# Altium PCB PCB_Clock_STM8.PcbDoc
Units mm, origin at the board's own origin, x right, y up, seen from the top; angles counter-clockwise.
Board outline 80 x 80 mm, 2 copper layers (Top Layer, Bottom Layer), stack 1.671 mm thick; 49 components, 32 nets, 176 pads, 118 vias.
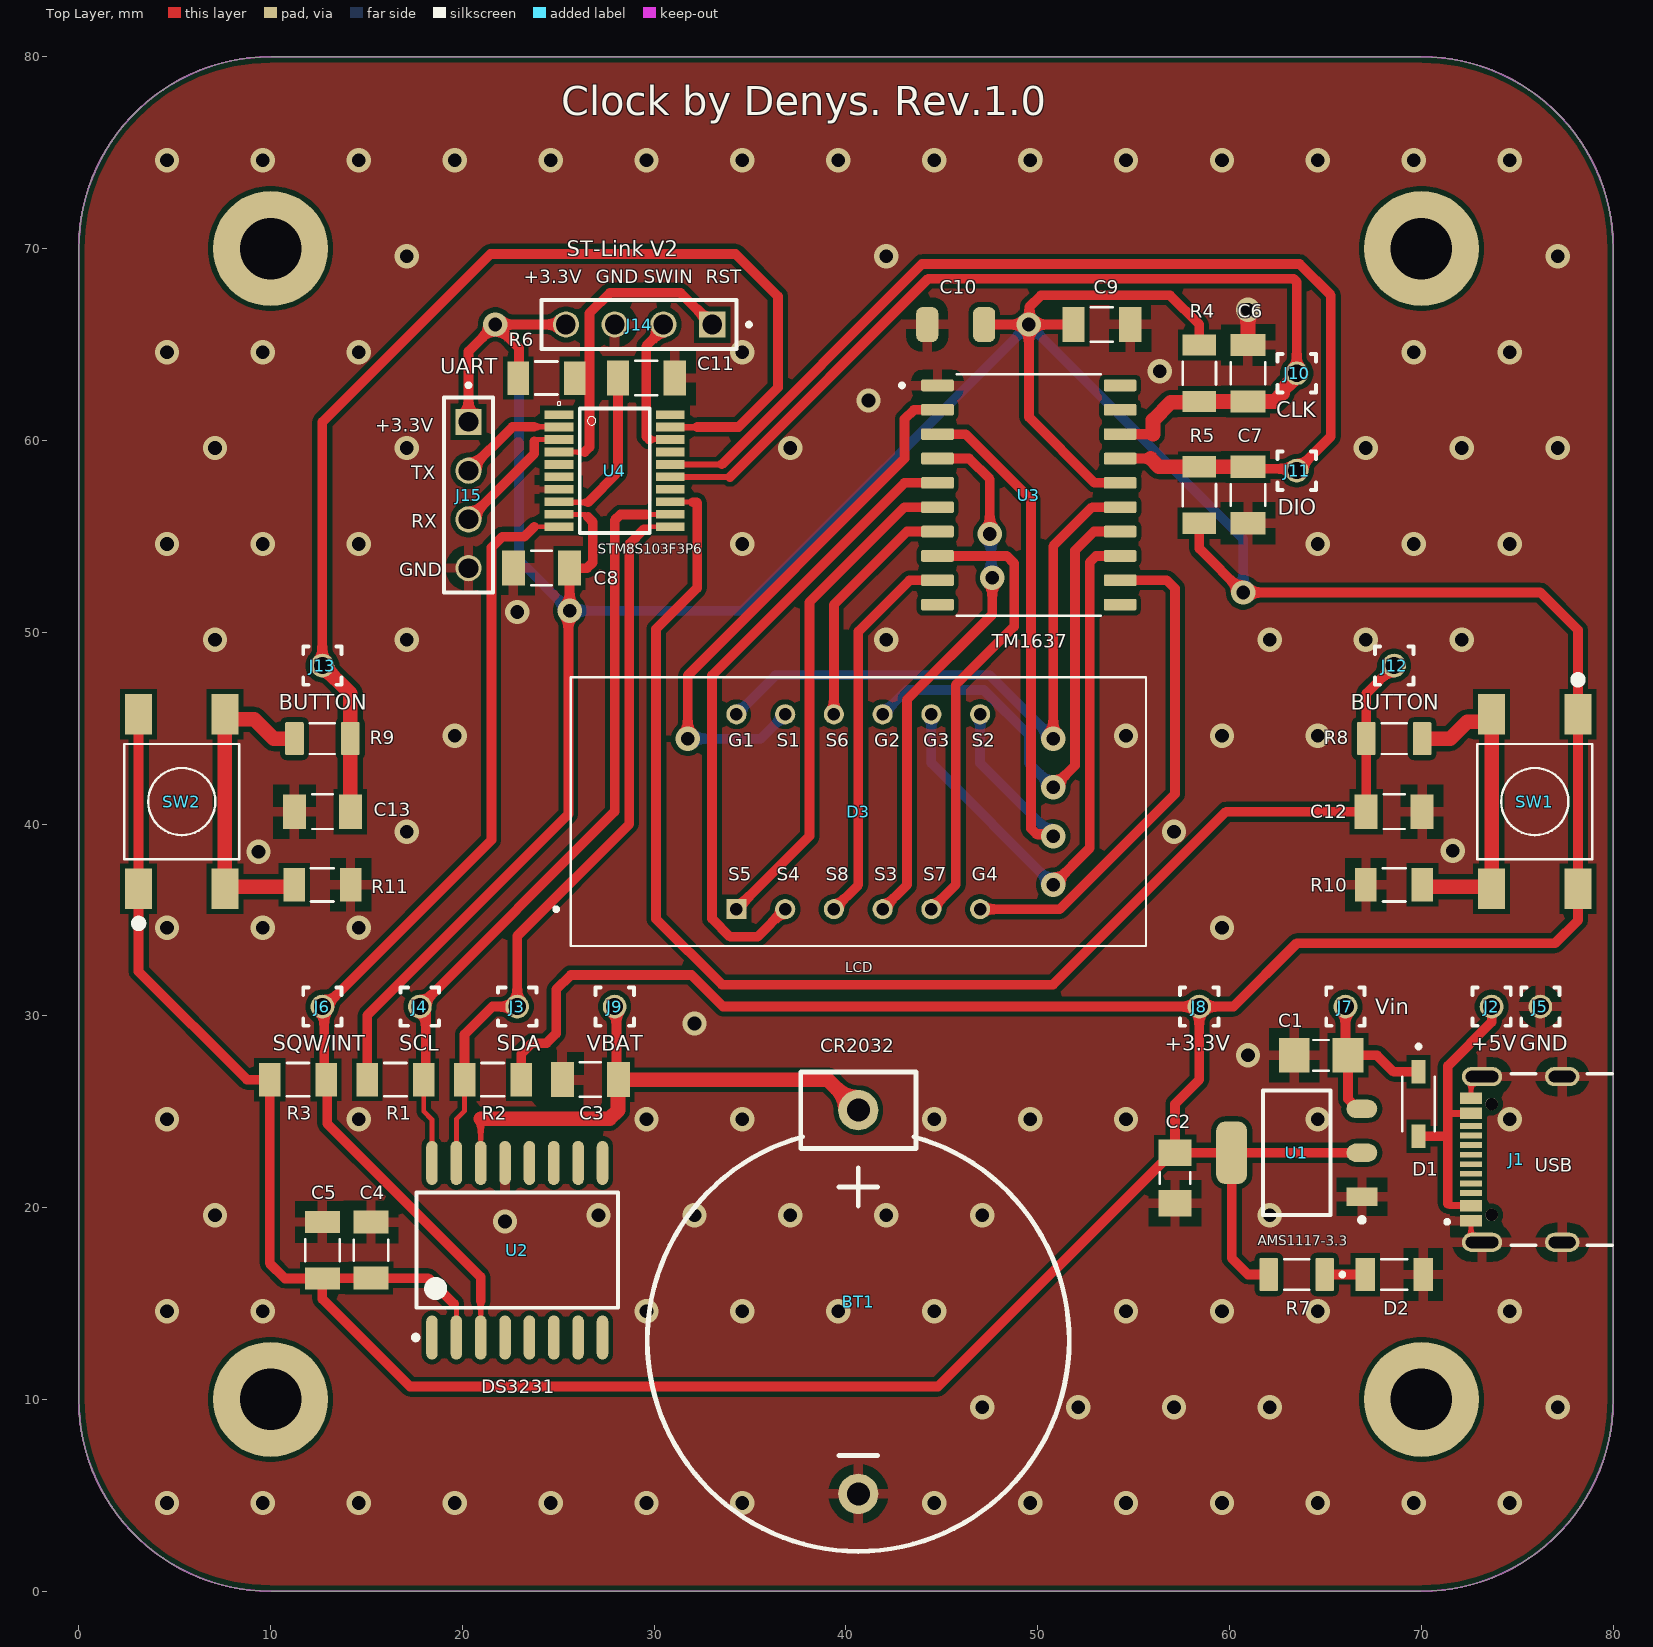
[diagram p0: Top Layer view]
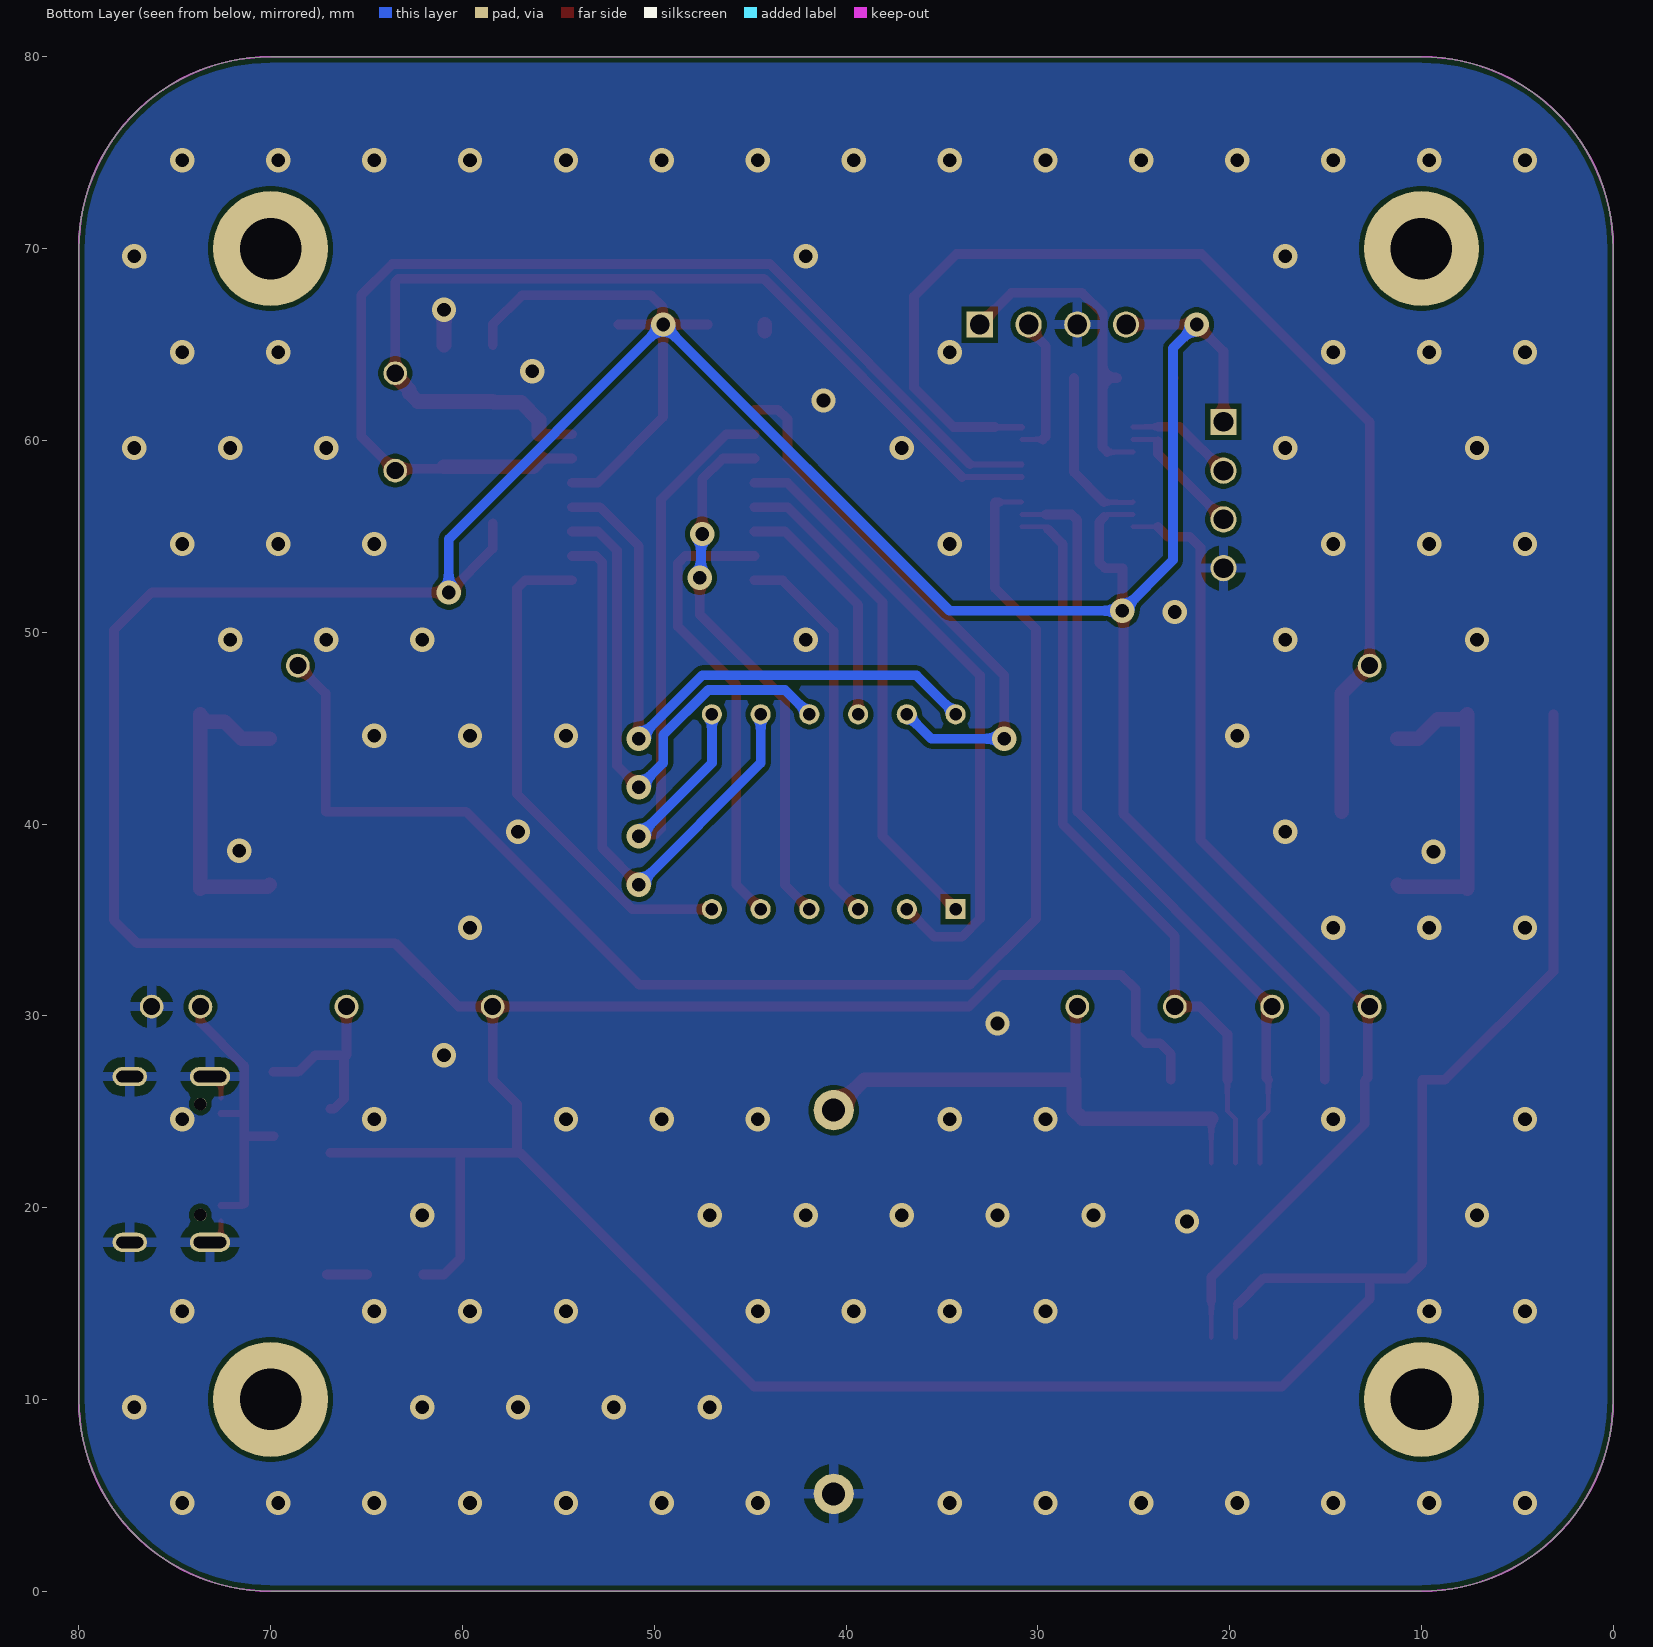
[diagram p1: Bottom Layer view, seen from below]
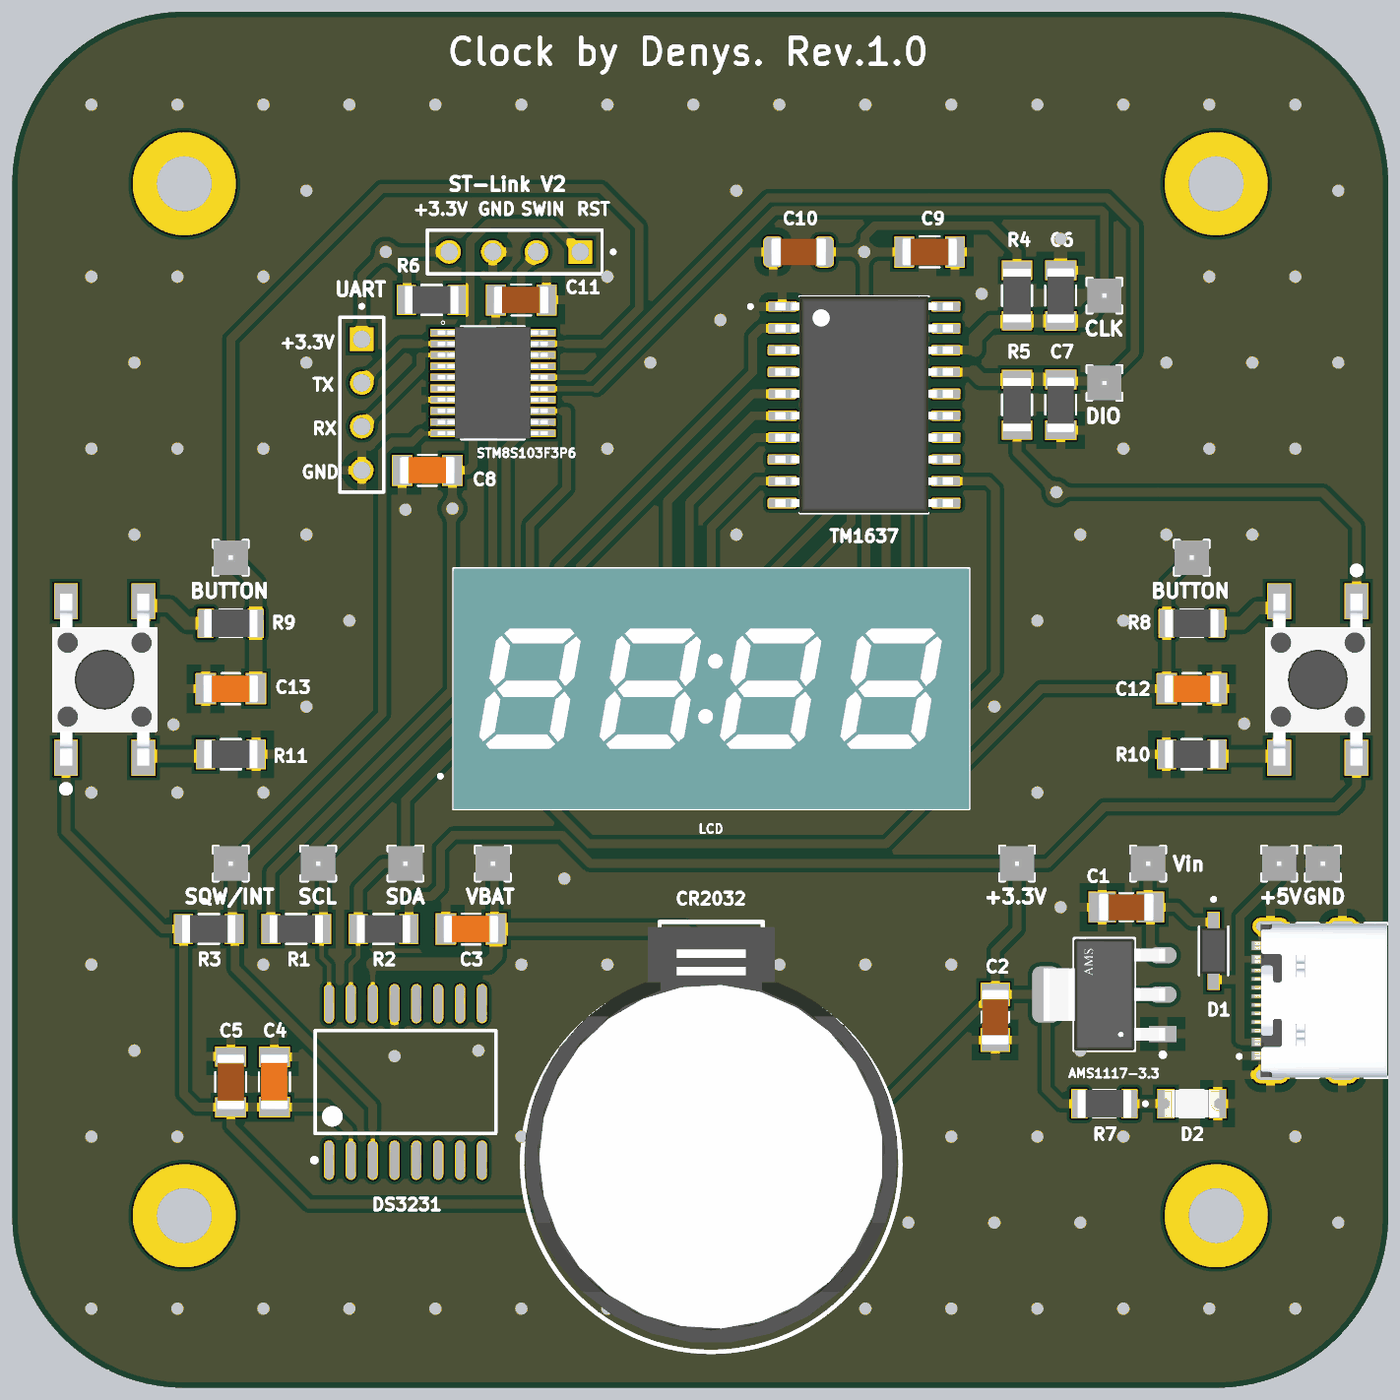
[diagram p2: 3D render of the assembled board from above, using the file's embedded part models]

## Layer stack, top to bottom
Top Solder: solder mask 0.0102, Solder Resist, Dk 3.5
Top Layer: signal copper 0.0356
Dielectric 1: dielectric 1.6, FR-4, Dk 4.8
Bottom Layer: signal copper 0.0356
Bottom Solder: solder mask 0.0102, Solder Resist, Dk 3.5

## Board outline
0,10 0,70 cw(c10,70) 10,80 70,80 cw(c70,70) 80,70 80,10 cw(c70,10) 70,0 10,0 cw(c10,10)

## Design rules (kind name [scope] priority, off if disabled: settings)
Clearance [All] p1: gap=0.254 ignorepadtopadclearanceinfootprint=TRUE
HoleSize [All] p1: absolutevalues=TRUE maxlimit=3.81 minlimit=0.025 maxpercent=80.000 minpercent=20.000
PasteMaskExpansion [All] p1: expansion=-0.05
PlaneConnect [All] p1: planeconnectstyle=Relief reliefexpansion=0.508 reliefentries=4 reliefconductorwidth=0.254 reliefairgap=0.508
PolygonConnect [All] p1: thpad.connectstyle=Relief thpad.reliefconductorwidth=0.508 thpad.reliefentries=4 thpad.polygonreliefangle="90 Angle" thpad.airgapwidth=0.508 smdpad.connectstyle=Relief smdpad.reliefconductorwidth=0.508 smdpad.reliefentries=4 smdpad.polygonreliefangle="90 Angle" smdpad.airgapwidth=0.508 via.connectstyle=Direct via.reliefconductorwidth=0.254 via.reliefentries=4 via.polygonreliefangle="90 Angle" via.airgapwidth=0.508
RoutingVias [All] p1: holewidth=0.711 width=1.27 viastyle="Through Hole" minholewidth=0.3 minwidth=0.6 maxholewidth=0.711 maxwidth=1.27
SMDNeckDown [All] p1: percent=90.000
SilkToSilkClearance [All] p1: silktosilkclearance=0.203
SilkToSolderMaskClearance [IsPad] p1: minsilkscreentomaskgap=0.127 clearancetoexposedcopper=TRUE
SolderMaskExpansion [All] p1: expansion=0.102 istentingtop=FALSE
SupplyNets "Schematic Supply Nets_2" [InNet('GND')] p1: voltage=0.000
SupplyNets "Schematic Supply Nets_1" [InNet('+5')] p2: voltage=0.000
SupplyNets "Schematic Supply Nets" [InNet('+3.3V')] p3: voltage=0.000
Width [All] p1: maxlimit=0.762 minlimit=0.254 preferedwidth=0.508 minimp=50.000000 maximp=50.000000 favimp=50.000000
25 further rules are at their usual default settings.

## Components (designator, comment, footprint, x,y, rotation, side; value= is the part's Value field where it differs from the comment)
BT1 "CR2032" PCB_Battery 40.64,5.08 r180 top
C1 "10uF" CAPC3216X190 64.77,27.94 r180 top
C2 "22uF" CAPC3216X125N 57.15,21.542 r90 top
C3 "100nF" CAPC3216X180N 26.67,26.67 r180 top
C4 "100nF" CAPC3216X180N 15.24,17.78 r90 top
C5 "1uF" CAPC3216X110N 12.7,17.78 r90 top
C6 "100pF" CAPC3216X110N 60.96,63.5 r90 top
C7 "100pF" CAPC3216X110N 60.96,57.15 r270 top
C8 "100nF" CAPC3216X180N 24.13,53.34 r180 top
C9 "1uF" CAPC3216X110N 53.34,66.04 r0 top
C10 "100uF" CAP3216X125N 45.72,66.04 r180 top
C11 "680nF" CAPC3216X110N 29.591,63.246 r0 top
C12 "100nF" CAPC3216X180N 68.58,40.64 r0 top
C13 "100nF" CAPC3216X180N 12.7,40.64 r180 top
D1 "1N5819" SOD3715X145N 69.85,25.4 r270 top
D2 "LED" LEDC3216X120N 68.58,16.51 r0 top
D3 "LCD" LED_LDQ-M3604RI 40.64,40.64 r0 top
J1 "USB" GCT_USB4105-GF-A 77.34,22.51 r90 top
J2 "+5V" SAMTEC_MTMM-101-X-X-S-X 73.66,30.48 r90 top
J3 "SDA" SAMTEC_MTMM-101-X-X-S-X 22.86,30.48 r180 top
J4 "SCL" SAMTEC_MTMM-101-X-X-S-X 17.78,30.48 r180 top
J5 "GND" SAMTEC_MTMM-101-X-X-S-X 76.2,30.48 r90 top
J6 "SQW/INT" SAMTEC_MTMM-101-X-X-S-X 12.7,30.48 r90 top
J7 "Vin" SAMTEC_MTMM-101-X-X-S-X 66.04,30.48 r90 top
J8 "+3.3V" SAMTEC_MTMM-101-X-X-S-X 58.42,30.48 r90 top
J9 "VBAT" SAMTEC_MTMM-101-X-X-S-X 27.94,30.48 r90 top
J10 "CLK" SAMTEC_MTMM-101-X-X-S-X 63.5,63.5 r90 top
J11 "DIO" SAMTEC_MTMM-101-X-X-S-X 63.5,58.42 r90 top
J12 "BUTTON" SAMTEC_MTMM-101-X-X-S-X 68.58,48.26 r90 top
J13 "BUTTON" SAMTEC_MTMM-101-X-X-S-X 12.7,48.26 r90 top
J14 "ST-Link V2" SAMTEC_TSW-104-07-S-S 29.21,66.04 r180 top
J15 "UART" SAMTEC_TSW-104-07-S-S 20.32,57.15 r270 top
R1 "10k" RESC3216X71N 16.51,26.67 r0 top
R2 "10k" RESC3216X71N 21.59,26.67 r180 top
R3 "10k" RESC3216X71N 11.43,26.67 r0 top
R4 "10k" RESC3216X71N 58.42,63.5 r270 top
R5 "10k" RESC3216X71N 58.42,57.15 r90 top
R6 "10k" RESC3216X71N 24.384,63.246 r0 top
R7 "1k" RESC3116X65N 63.5,16.51 r180 top
R8 "1k" RESC3116X65N 68.58,44.45 r180 top
R9 "1k" RESC3116X65N 12.7,44.45 r0 top
R10 "10k" RESC3216X71N 68.58,36.83 r180 top
R11 "10k" RESC3216X71N 12.7,36.83 r0 top
SW1 "BUTTON" TE_4-1437565-9 75.91,41.17 r270 top
SW2 "BUTTON" TE_4-1437565-9 5.37,41.17 r90 top
U1 "AMS1117-3.3" FP-AMS1117-IPC_A 63.5,22.86 r180 top
U2 "DS3231" W16#H2_N 22.86,17.78 r90 top
U3 "TM1637" SOIC127P1035X255-20N 49.53,57.15 r0 top
U4 "STM8S103F3P6" SOP65P640X120-20N 27.94,58.42 r0 top

## Footprints (in the part's own frame and the unit in brackets; to place one, negate y for a bottom-side part, rotate by r counter-clockwise, add the part's x,y. Pads: shape width x height; smd on the part's side, far side on the other; paste and mask are expansions set on the pad)
CAP3216X125N [mm]
  rrect54% 1.15x1.82 smd: 1(-1.485,0) 2(1.485,0)
  body extent -1.6,-0.8 1.6,0.8, height 1.8
CAPC3216X110N [mm]
  rect 1.16x1.82 smd: 1(-1.475,0) 2(1.475,0)
  silkscreen extent -0.57,-0.9 0.57,0.9, body extent -1.6,-0.8 1.6,0.8, height 1.4
CAPC3216X125N [mm]
  rect 1.38x1.71 smd: 1(-1.318,0) 2(1.318,0)
  silkscreen extent -0.31,-0.8 0.31,0.8, body extent -1.6,-0.8 1.6,0.8, height 1.9
CAPC3216X180N [mm]
  rect 1.2x1.82 smd: 1(-1.46,0) 2(1.46,0)
  silkscreen extent -0.54,-0.9 0.54,0.9, body extent -1.6,-0.8 1.6,0.8, height 1.8
CAPC3216X190 [mm]
  rect 1.6x1.8 smd: 1(-1.4,0) 2(1.4,0)
  silkscreen extent -0.4,-0.8 0.4,0.8, body extent -1.6,-0.8 1.6,0.8, height 1.8
FP-AMS1117-IPC_A [mm]
  rect 1.604x0.952 smd paste+0 mask+0: 1(-3.395,2.29)
  rrect100% 1.604x0.952 smd paste+0 mask+0: 2(-3.395,0) 3(-3.395,-2.29)
  rrect59% 1.604x3.262 smd paste+0 mask+0: 4(3.395,0)
  silkscreen extent -3.52,-3.25 1.75,3.62, body extent -4.7,-3.75 4.7,3.75, height 0.25
GCT_USB4105-GF-A [mm]
  rect 0.6x1.15 smd mask-0.05: A1_B12(-3.2,4.755) A4_B9(-2.4,4.755) B1_A12(3.2,4.755) B4_A9(2.4,4.755)
  rect 0.3x1.15 smd mask-0.05: A5(-1.25,4.755) A6(-0.25,4.755) A7(0.25,4.755) A8(1.25,4.755) B5(1.75,4.755) B6(0.75,4.755) B7(-0.75,4.755) B8(-1.75,4.755)
  oval 1x2.1 hole 0.6 slot 1.7 at 90 deg: SH1(-4.32,4.18) SH2(4.32,4.18)
  oval 1x1.8 hole 0.6 slot 1.4 at 90 deg: SH3(-4.32,0) SH4(4.32,0)
  round 0.65 hole 0.65 unplated mask-0.05: ""(-2.89,3.68) ""(2.89,3.68)
  silkscreen extent -4.47,-2.6 4.47,6.1, body extent -4.47,-2.6 4.47,5.11, height 3.31
LED_LDQ-M3604RI [mm]
  rect 1.05x1.05 / inner round 1.05 / far side rect 1.05x1.05 hole 0.65: 1(-6.35,-5.08)
  round 1.05 hole 0.65: 2(-3.81,-5.08) 3(-1.27,-5.08) 4(1.27,-5.08) 5(3.81,-5.08) 6(6.35,-5.08) 7(6.35,5.08) 8(3.81,5.08) 9(1.27,5.08) 10(-1.27,5.08) 11(-3.81,5.08) 12(-6.35,5.08)
  silkscreen extent -15.85,-7 15,7, body extent -15,-7 15,7, height 7.2
LEDC3216X120N [mm]
  rect 1.01x1.73 smd: NEG(1.51,0) POS(-1.51,0)
  silkscreen extent -2.8,-0.8 0.68,0.8, body extent -1.6,-0.8 1.6,0.8, height 1.2
PCB_Battery [mm] "Cell Holder for CR2032"
  round 2.1 hole 1.2: 1(0,-20) 2(0,0)
  silkscreen extent -11,-22 11,3, body extent -10.85,-21.7 10.85,2.5, height 7.5
RESC3116X65N [mm]
  rrect15% 0.97x1.73 smd: 1(-1.455,0) 2(1.455,0)
  silkscreen extent -0.65,-0.8 0.65,0.8, body extent -1.55,-0.8 1.55,0.8, height 0.65
RESC3216X71N [mil]
  rect 44x69 smd: 1(-58,0) 2(58,0)
  silkscreen extent -23,-34 23,34, body extent -61,-31 61,31, height 26
SAMTEC_MTMM-101-X-X-S-X [mm]
  round 1.24 hole 0.89: 01(0,0)
  silkscreen extent -1,-1 1,1, body extent -1,-1 1,1, height 4.55
SAMTEC_TSW-104-07-S-S [mm]
  rect 1.37x1.37 hole 1.02: 01(-3.81,0)
  round 1.37 hole 1.02: 02(-1.27,0) 03(1.27,0) 04(3.81,0)
  silkscreen extent -5.83,-1.27 5.08,1.27
SOD3715X145N [mm]
  rect 1.21x0.73 smd: A(1.68,0) C(-1.68,0)
  silkscreen extent -3.1,-0.85 1.42,0.85, body extent -1.83,-0.77 1.83,0.77, height 0.8
SOIC127P1035X255-20N [mm]
  rrect25% 1.7x0.61 smd: 1(-4.76,5.715) 2(-4.76,4.445) 3(-4.76,3.175) 4(-4.76,1.905) 5(-4.76,0.635) 6(-4.76,-0.635) 7(-4.76,-1.905) 8(-4.76,-3.175) 9(-4.76,-4.445) 10(-4.76,-5.715) 11(4.76,-5.715) 12(4.76,-4.445) 13(4.76,-3.175) 14(4.76,-1.905) 15(4.76,-0.635) 16(4.76,0.635) 17(4.76,1.905) 18(4.76,3.175) 19(4.76,4.445) 20(4.76,5.715)
  silkscreen extent -6.71,-6.3 3.75,6.3, body extent -5.18,-6.3 5.18,6.3, height 2.55
SOP65P640X120-20N [mm]
  rect 1.5x0.45 smd: 1(-2.9,2.925) 2(-2.9,2.275) 3(-2.9,1.625) 4(-2.9,0.975) 5(-2.9,0.325) 6(-2.9,-0.325) 7(-2.9,-0.975) 8(-2.9,-1.625) 9(-2.9,-2.275) 10(-2.9,-2.925) 11(2.9,-2.925) 12(2.9,-2.275) 13(2.9,-1.625) 14(2.9,-0.975) 15(2.9,-0.325) 16(2.9,0.325) 17(2.9,0.975) 18(2.9,1.625) 19(2.9,2.275) 20(2.9,2.925)
  silkscreen extent -3,-3.25 1.82,3.6, body extent -3.2,-3.25 3.2,3.25, height 1.29
TE_4-1437565-9 [mm]
  rect 2.1x1.4 smd: 1(-4.55,2.25) 2(4.55,2.25) 3(-4.55,-2.25) 4(4.55,-2.25)
  silkscreen extent -6.55,-3 3,3, body extent -5,-3 5,3, height 7.26
W16#H2_N [mm] "SOIC, 16-Leads, Body 10.3x7.5mm, Pitch 1.27mm, IPC Medium Density"
  oval 2.3x0.6 smd: 1(-4.55,4.445) 2(-4.55,3.175) 3(-4.55,1.905) 4(-4.55,0.635) 5(-4.55,-0.635) 6(-4.55,-1.905) 7(-4.55,-3.175) 8(-4.55,-4.445) 9(4.55,-4.445) 10(4.55,-3.175) 11(4.55,-1.905) 12(4.55,-0.635) 13(4.55,0.635) 14(4.55,1.905) 15(4.55,3.175) 16(4.55,4.445)
  silkscreen extent -4.67,-5.25 3,5.42, body extent -3.8,-5.25 3.8,5.25, height 2.65

## Part data
BT1: library part Battery, "Cell Holder for CR2032"
C1: library part GRM31CB31E106KA75L, "Cap Ceramic 10uF 25V B 10% Pad SMD 1206 85Â°C T/R", Package=None, Availability=Unavailable, MP=GRM31CB31E106KA75L, Price=None
C2: library part GRM31CR61E226KE15L, "CAPACITOR, 1206, X5R, 25V, 22UF; Dielectric Characteristic:X5R; Capacitance:22µF; Capacitance Tolerance:± 10%; Voltage Rating:25V; Series:GRM Hi-Cap; Capacitor Case Style:1206; No. of Pins:2; Capacitor Mounting:SMD; SVHC:No SVHC ;RoHS Compliant: Yes", Package=None, Availability=Unavailable, MP=altium_native_batch, Price=None
C3 C4 C8 C12 C13: library part CL31B104KBCNNNC, "Ceramic capacitor SMD 1206 100 nF 50 V 10 % Samsung Electro-Mechanics CL31B104KBCNNNC 4000 pc(s)", Package="1206 Samsung", Availability="In Stock", Check_prices=https://www.snapeda.com/parts/CL31B104KBCNNNC/Samsung+Electro-Mechanics/view-part/?ref=eda, MF="Samsung Electro-Mechanics", MP=CL31B104KBCNNNC, Price=None, Purchase-URL=https://pricing.snapeda.com/search/part/CL31B104KBCNNNC/?ref=eda, SnapEDA_Link=https://www.snapeda.com/parts/CL31B104KBCNNNC/Samsung+Electro-Mechanics/view-part/?ref=snap
C5 C9: library part C1206C105J3RACTU, "CAP CER 1UF 25V X7R 1206", Package=None, Availability=Unavailable, MP=C1206C105J3RACTU, Price=None
C6 C7: library part C1206C101JBGACTU, "CAP, MLCC, C0G, 100PF, 630V, 1206", Package=None, Availability=Unavailable, MP=C1206C101JBGACTU, Price=None
C10: library part GRM31CR60J107KE39L, "100µF Â±10% 6.3V Ceramic Capacitor X5R 1206 _3216 Metric_", Package="1206 Murata", Digi-Key_Part_Number=490-13982-1-ND, Digi-Key_Purchase_URL=https://www.digikey.com/product-detail/en/murata-electronics/GRM31CR60J107KE39L/490-13982-1-ND/6155812?utm_source=snapeda&utm_medium=aggregator&utm_campaign=symbol, MF="Murata Electronics", MP=GRM31CR60J107KE39L, SnapEDA_Link=https://www.snapeda.com/parts/GRM31CR60J107KE39L/Murata%20Electronics%20North%20America/view-part/1756509/?ref=snap
C11: library part C1206C684K5RACTU, ".68UF 50V 10% 1206", Package=None, Availability=Unavailable, MP=C1206C684K5RACTU, Price=None
D1: library part 1N5819HW-7, "Diode Schottky 40 V 1A Surface Mount SOD-123", Package="SOD-123 Fairchild Semiconductor", Availability="In Stock", Check_prices=https://www.snapeda.com/parts/1N5819HW-7/Diodes+Inc./view-part/?ref=eda, MF="Diodes Inc.", MP=1N5819HW-7, Price=None, Purchase-URL=https://pricing.snapeda.com/search/part/1N5819HW-7/?ref=eda, SnapEDA_Link=https://www.snapeda.com/parts/1N5819HW-7/Diodes+Inc./view-part/?ref=snap
D2: library part LHN974_RED_LED_1206, "2.6 V Red LED SMD", Package=None, Availability="Not in stock", Check_prices=https://www.snapeda.com/parts/LHN974%20RED%20LED%201206/Osram/view-part/7899607/?ref=eda, MF=Osram, MP="LHN974 RED LED 1206", Price=None, SnapEDA_Link=https://www.snapeda.com/parts/LHN974%20RED%20LED%201206/Osram/view-part/7899607/?ref=snap
D3: library part LDQ-M3604RI, "Display, Seven Segment, 9.2MM, Red", Package=None, Check_prices=https://www.snapeda.com/parts/LDQ-M3604RI/Lumex/view-part/?ref=eda, MF=Lumex, MP=LDQ-M3604RI, SnapEDA_Link=https://www.snapeda.com/parts/LDQ-M3604RI/Lumex/view-part/?ref=snap
J1: library part USB4105-GF-A, Package=None, Availability=Unavailable, MF="{'manufacturer': u'GCT'}", MP=USB4105-GF-A, Price=None
J2 J3 J4 J5 J6 J7 J8 J9 J10 J11 J12 J13: library part MTMM-101-X-X-S-X, "Connector Header Through Hole 1 position", Package=None, Check_prices=https://www.snapeda.com/parts/MTMM-101-05-G-S-225/Samtec/view-part/?ref=eda, MF=Samtec, MP=MTMM-101-05-G-S-225, SnapEDA_Link=https://www.snapeda.com/parts/MTMM-101-05-G-S-225/Samtec/view-part/?ref=snap
J14 J15: library part TSW-104-07-S-S, Package=None, Availability=Unavailable, MF="Samtec Inc.", MP=TSW-104-07-S-S, Price=None
R1 R2 R3 R4 R5 R6 R10 R11: library part RC1206FR-0710KL, "RES, 10K, 1%, 0.25W, 1206, THICK FILM; Resistor Case Style:1206 [3216 Metric]; Resistance:10kohm; Product Range:RC Series; Voltage Rating:200V; Resistor Element Material:Thick Film; Power Rating:250mW; Resistance Tolerance:Â± 1%; Temperature Coefficient:Â± 100ppm/Â°C; Automotive Qualification Standard:-; SVHC:No SVHC (15-Jan-2019)", Package="1206-2 YAGEO", Check_prices=https://www.snapeda.com/parts/RC1206FR0710KL/Yageo/view-part/?ref=eda, MF="Yageo Corporation", MP=RC1206FR0710KL, SnapEDA_Link=https://www.snapeda.com/parts/RC1206FR0710KL/Yageo/view-part/?ref=snap
R7 R8 R9: library part SR1206FR-071KL, "Surge Chip Resistor Automotive Grade Thick Film 1206 1kOhm 1% Paper T/R", Package="1206-2 YAGEO", Check_prices=https://www.snapeda.com/parts/SR1206FR071KL/Yageo/view-part/?ref=eda, MF="Yageo Corporation", MP=SR1206FR071KL, SnapEDA_Link=https://www.snapeda.com/parts/SR1206FR071KL/Yageo/view-part/?ref=snap
SW1 SW2: library part 4-1437565-9, "Alcoswitch, Switch, Tactile, 50 mA, SPST, Pushbutton, Off[On], FSM6JSMA", Contact_Current_Rating="50 mA", Package=None, Check_prices=https://www.snapeda.com/parts/FSM6JSMA/TE+Connectivity+ALCOSWITCH+Switches/view-part/?ref=eda, Configuration_Pole-Throw="Single Pole - Single Throw", EU_RoHS_Compliance=Compliant, MF="TE Connectivity", MP=FSM6JSMA, SnapEDA_Link=https://www.snapeda.com/parts/FSM6JSMA/TE+Connectivity+ALCOSWITCH+Switches/view-part/?ref=snap
U1: library part CMP-209535-000001-1, "LDO Voltage Regulators 1A, 3.3V", Dropout Voltage=1.1V, Manufacturer="Advanced Monolithic Systems", Max Junction Temp=+125°C, Max Power Dissipation=1.2W, Max Supply Voltage=15V, Nominal Supply Current=5mA, Output Current=1A, Output Voltage=3.3V, Package=AMS1117, Temperature="-40°C to +125°C", Temperature Range Low=-40°C, Automotive=No, Category=IC, ComponentLink2Description=Datasheet, ComponentLink2URL=http://www.advanced-monolithic.com/pdf/ds1117.pdf, Device Class L1="Integrated Circuits (ICs)", Device Class L2="Power Management ICs", Device Class L3="Voltage Regulators - Linear", Height=1.8mm, Ipc Land Pattern Name=SOT229P700X180-4, Lead Free=Yes, Manufacturer Part Number=AMS1117-3.3, Number Of Outputs=1, Octopart=https://octopart.com/ams1117-3.3-advanced+monolithic+systems-25899300, Output Type=Fixed, RoHS=TRUE, Standoff Height=0.64mm, Temperature Range High=+125°C
U2: library part CMP-0254-00293-2, "Extremely Accurate I2C-Integrated Real-Time Clock/TCXO/Crystal, 16-Pin SO, -40 to 85 degC, RoHS Qualified", Code_IPC=SOIC127P1030-16, Code_JEDEC=MS-013-AA, ComponentLink1Description="Manufacturer URL", ComponentLink1URL=http://www.maxim-ic.com, ComponentLink2Description=Datasheet, ComponentLink2URL=http://datasheets.maxim-ic.com/en/ds/DS3231.pdf, ComponentLink3Description="Package Specification", ComponentLink3URL=http://pdfserv.maxim-ic.com/package_dwgs/21-0042.PDF, DatasheetVersion="Rev 8, Jul-2010", PackageDescription="16-Pin Small-Outline IC, Wide (0.3in), 1.27 mm Pitch, SOIC (W), RoHS Qualified", PackageReference=W16#H2, PackageVersion="revD, 2010"
U3: library part TM1637_SOP20, "LED Drive Control Special Circuit", Package=Package, Check_prices=https://www.snapeda.com/parts/TM1637_SOP20/Titan+Micro+Electronics/view-part/?ref=eda, MF="Titan Micro Electronics", MP=TM1637_SOP20, SnapEDA_Link=https://www.snapeda.com/parts/TM1637_SOP20/Titan+Micro+Electronics/view-part/?ref=snap
U4: "STM8 series Microcontroller IC 8-Bit 16MHz 8KB (8K x 8) FLASH 20-TSSOP", Package="TSSOP-20 STMicroelectronics", Check_prices=https://www.snapeda.com/parts/STM8S103F3P6/STMicroelectronics/view-part/?ref=eda, MF=STMicroelectronics, MP=STM8S103F3P6, SnapEDA_Link=https://www.snapeda.com/parts/STM8S103F3P6/STMicroelectronics/view-part/?ref=snap

## Free pads (board coordinates)
  round 6 hole 3.2: 1(10,10) 2(10,70) 3(70,70) 4(70,10)

## Via types
v1: diameter 1.27, hole 0.711, Top Layer to Bottom Layer, tented both sides, 118 vias

## Nets (pads, with @x,y where several pads share a name; then routed paths per layer and width w, separated by ;. In a path a pad name is that pad's centre, name@x,y a point inside that pad or via, vN(x,y) a via of type N, cw(c..) or ccw(c..) an arc to the next point about the centre after c; other vN are vias at no path point)
+3.3V: C2.2 C4.1 C5.1 C8.1 C9.1 C10.1 J8.01 J14.04 J15.01 R1.1 R2.1 R3.1 R4.1 R5.1 R6.1 R7.2 SW1.1 SW1.2 SW2.1 SW2.2 U1.2 U1.4 U2.2 U3.16 U4.9 | length 364.3
  Top Layer w0.254: 19.558,14.986 19.685,14.859 U2.2 ; U4.9 26.405,56.145 26.543,56.007
  Top Layer w0.508: SW2.2 SW2.1 3.12,32.313 8.763,26.67 R3.1 9.957,17.094 10.746,16.305 C5.1 ; R1.1 15.037,30.023 25.527,40.513 25.527,51.055 v1(25.59,51.118) C8.1 26.499,53.34 26.797,53.638 26.797,55.753 26.543,56.007 ; 19.558,14.986 18.224,16.32 C4.1 15.233,16.313 12.707,16.313 C5.1 ; J15.01 20.32,64.643 v1(21.717,66.04) ; R6.1 22.949,63.284 22.949,64.808 v1(21.717,66.04) ; R2.1 23.063,28.016 23.622,28.575 24.384,28.575 24.892,29.083 24.892,31.369 25.654,32.131 31.942,32.131 33.593,30.48 J8.01 ; J14.04 v1(21.717,66.04) ; C10.1 v1(49.535,66.04) ; C9.1 v1(49.535,66.04) ; U3.16 52.959,57.785 49.535,61.209 v1(49.535,66.04) ; R5.1 58.42,54.356 v1(60.706,52.07) 76.2,52.07 78.16,50.11 SW1.1 SW1.2 78.16,34.98 76.962,33.782 63.5,33.782 60.198,30.48 J8.01 ; R4.1 58.42,66.04 56.896,67.564 50.165,67.564 49.568,66.967 49.568,66.073 v1(49.535,66.04) ; R7.2 60.96,16.51 60.105,17.365 U1.4 ; U1.2 U1.4 ; C5.1 12.7,15.24 17.272,10.668 44.793,10.668 56.985,22.86 C2.2 ; C2.2 57.15,25.4 58.42,26.67 J8.01 ; C2.2 U1.4
  Bottom Layer w0.508: v1(21.717,66.04) 22.949,64.808 22.949,53.759 v1(25.59,51.118) 34.613,51.118 v1(49.535,66.04) 60.706,54.869 v1(60.706,52.07)
+5: D1.A J1.A4_B9 J1.B4_A9 J2.01 | length 14.8
  Top Layer w0.381: 71.482,20.11 J1.A4_B9 ; 71.61,24.91 J1.B4_A9
  Top Layer w0.508: D1.A 71.32,23.72 ; 71.374,20.218 71.374,27.381 73.66,29.667 J2.01
Button1: C12.1 J12.01 R8.2 U4.13 | length 74.4
  Top Layer w0.254: U4.13 31.978,56.795 32.004,56.769
  Top Layer w0.508: 32.004,56.769 32.214,56.769 32.238,56.745 32.238,52.304 30.099,50.165 30.099,35.052 33.528,31.623 50.8,31.623 59.819,40.642 67.122,40.642 67.122,44.448 R8.2 67.125,46.805 J12.01
Button2: C13.1 J13.01 R9.2 U4.19 | length 60.4
  Top Layer w0.342: U4.19 32.25,60.695
  Top Layer w0.508: J13.01 12.7,60.96 21.463,69.723 34.239,69.723 36.449,67.513 36.449,62.752 34.391,60.695 32.25,60.695
  Top Layer w0.762: J13.01 14.155,46.805 R9.2 14.158,44.448 14.158,40.642 C13.1
CLK: C6.1 J10.01 R4.2 U3.18 U4.15 | length 52.9
  Top Layer w0.3: U4.15 33.955,58.095
  Top Layer w0.508: 33.955,58.095 44.287,68.428 63.337,68.428 63.5,68.264 J10.01 ; U3.18 56.007,60.325
  Top Layer w0.762: 56.007,60.325 56.007,61.062 56.932,61.987 58.38,61.987 R4.2 ; R4.2 C6.1@60.959,62.026 ; C6.1 60.962,62.027 62.332,62.027 62.778,62.473 62.778,62.649 63.5,63.371 J10.01
DIO: C7.1 J11.01 R5.2 U3.17 U4.16 | length 58.8
  Top Layer w0.3: U4.16 33.515,58.745 33.523,58.753
  Top Layer w0.508: 33.523,58.753 33.527,58.753 43.964,69.19 63.652,69.19 65.272,67.57 65.272,60.192 J11.01 63.398,58.522 61.062,58.522 C7.1 ; U3.17 55.88,59.055
  Top Layer w0.762: 55.88,59.055 56.312,58.623 R5.2 ; R5.2 C7.1@60.959,58.624
GND: BT1.2 C1.2 C2.1 C3.2 C4.2 C5.2 C6.2 C7.2 C8.2 C9.2 C10.2 C11.2 C12.2 C13.2 D2.NEG J1.A1_B12 J1.B1_A12 J1.SH1 J1.SH2 J1.SH3 J1.SH4 J5.01 J14.03 J15.04 R10.2 R11.2 U1.1 U2.13 U3.1 U4.7 | length 5.1
  Top Layer w0.254: J1.A1_B12 72.585,18.535 72.93,18.19 J1.SH1 ; J1.B1_A12 72.585,26.485 72.93,26.83 J1.SH2
  Top Layer w0.762: C10.2@44.235,65.705 C10.2 ; C6.2 v1(60.96,66.802)
  other v1: 4.6,4.6 9.6,4.6 14.6,4.6 19.6,4.6 24.6,4.6 29.6,4.6 34.6,4.6 44.6,4.6 49.6,4.6 54.6,4.6 59.6,4.6 64.6,4.6 69.6,4.6 74.6,4.6 47.1,9.6 52.1,9.6 57.1,9.6 62.1,9.6 77.1,9.6 4.6,14.6 9.6,14.6 29.6,14.6 34.6,14.6 39.6,14.6 44.6,14.6 54.6,14.6 59.6,14.6 64.6,14.6 74.6,14.6 22.225,19.279 7.1,19.6 27.1,19.6 32.1,19.6 37.1,19.6 42.1,19.6 47.1,19.6 62.1,19.6 4.6,24.6 14.6,24.6 29.6,24.6 34.6,24.6 44.6,24.6 49.6,24.6 54.6,24.6 64.6,24.6 74.6,24.6 60.96,27.94 32.1,29.6 4.6,34.6 9.6,34.6 14.6,34.6 59.6,34.6 9.373,38.557 71.628,38.608 17.1,39.6 57.1,39.6 19.6,44.6 54.6,44.6 59.6,44.6 64.6,44.6 7.1,49.6 17.1,49.6 42.1,49.6 62.1,49.6 67.1,49.6 72.1,49.6 22.86,51.054 4.6,54.6 9.6,54.6 14.6,54.6 34.6,54.6 64.6,54.6 69.6,54.6 74.6,54.6 7.1,59.6 17.1,59.6 37.1,59.6 67.1,59.6 72.1,59.6 77.1,59.6 41.173,62.078 56.363,63.602 4.6,64.6 9.6,64.6 14.6,64.6 34.6,64.6 69.6,64.6 74.6,64.6 17.1,69.6 42.1,69.6 77.1,69.6 4.6,74.6 9.6,74.6 14.6,74.6 19.6,74.6 24.6,74.6 29.6,74.6 34.6,74.6 39.6,74.6 44.6,74.6 49.6,74.6 54.6,74.6 59.6,74.6 64.6,74.6 69.6,74.6 74.6,74.6
GRID1: D3.12 U3.15 | length 33.1
  Top Layer w0.508: v1(50.8,44.45) 50.8,54.483 52.832,56.515 U3.15
  Bottom Layer w0.508: D3.12 36.322,47.752 47.498,47.752 v1(50.8,44.45)
GRID2: D3.9 U3.14 | length 28
  Top Layer w0.508: v1(50.8,41.91) 51.943,43.053 51.943,54.254 52.934,55.245 U3.14
  Bottom Layer w0.508: D3.9 43.18,46.99 47.182,46.99 49.53,44.642 49.53,43.18 v1(50.8,41.91)
GRID3: D3.8 U3.13 | length 30.8
  Top Layer w0.508: v1(50.8,36.83) 52.705,38.735 52.705,53.642 53.038,53.975 U3.13
  Bottom Layer w0.508: D3.8 44.45,43.18 v1(50.8,36.83)
GRID4: D3.6 U3.12 | length 26.4
  Top Layer w0.508: D3.6 51.146,35.56 57.15,41.564 57.15,52.28 56.725,52.705 U3.12
LED: D2.POS R7.1 | length 2.1
  Top Layer w0.508: R7.1 D2.POS
RST: J14.01 R6.2 U4.4 | length 17
  Top Layer w0.254: U4.4 26.375,59.395
  Top Layer w0.508: R6.2 25.883,63.271 26.626,63.271 ; 26.375,59.395 26.626,59.646 26.626,63.271 ; J14.01 31.369,67.691 27.686,67.691 26.626,66.631 26.626,63.271
RX: J15.03 U4.3 | length 6.8
  Top Layer w0.254: 23.749,59.944 23.85,60.045 U4.3
  Top Layer w0.508: J15.03 23.749,59.309 23.749,59.944
SCL: J4.01 R1.2 U2.16 U4.12 | length 41.1
  Top Layer w0.254: R1.2 17.983,25.019 18.415,24.587 U2.16 ; 29.591,56.134 29.602,56.145 U4.12
  Top Layer w0.508: R1.2 18.085,26.772 18.085,30.175 17.843,30.416 J4.01 27.94,40.64 27.94,55.836 28.238,56.134 29.591,56.134
SDA: J3.01 R2.2 U2.15 U4.11 | length 39.3
  Top Layer w0.254: U2.15 19.685,24.613 20.117,25.044 R2.2 ; 29.472,55.372 29.595,55.495 U4.11
  Top Layer w0.508: R2.2 20.117,29.032 21.565,30.48 J3.01 22.86,34.163 28.702,40.005 28.702,54.602 29.472,55.372
SEG1: D3.11 U3.2 | length 28.9
  Top Layer w0.508: v1(31.75,44.45) 31.75,47.752 43.053,59.055 43.053,61.112 43.536,61.595 U3.2
  Bottom Layer w0.508: v1(31.75,44.45) 35.56,44.45 D3.11
SEG2: D3.7 U3.3 | length 32.7
  Top Layer w0.508: U3.3 46.228,60.325 49.64,56.913 49.64,39.765 49.938,39.467 50.703,39.467 v1(50.8,39.37)
  Bottom Layer w0.508: D3.7 46.99,43.18 v1(50.8,39.37)
SEG3: D3.4 U3.4 | length 28
  Top Layer w0.508: D3.4 43.18,36.83 43.18,46.482 47.625,50.927 v1(47.625,52.832) ; U3.4 46.42,59.055 47.498,57.977 v1(47.498,55.118)
  Bottom Layer w0.508: v1(47.498,55.118) 47.561,55.054 47.561,52.895 v1(47.625,52.832)
SEG4: D3.2 U3.5 | length 33.4
  Top Layer w0.508: D3.2 35.389,34.119 33.962,34.119 33.02,35.062 33.02,47.752 43.053,57.785 U3.5
SEG5: D3.1 U3.6 | length 26.3
  Top Layer w0.508: D3.1 38.1,39.37 38.1,51.562 43.053,56.515 U3.6
SEG6: D3.10 U3.7 | length 12.7
  Top Layer w0.508: D3.10 39.37,51.435 43.18,55.245 U3.7
SEG7: D3.5 U3.8 | length 24
  Top Layer w0.508: D3.5 45.72,36.83 45.72,47.244 48.768,50.292 48.768,53.594 48.387,53.975 U3.8
SEG8: D3.3 U3.9 | length 20.2
  Top Layer w0.508: D3.3 40.64,36.83 40.64,50.038 43.307,52.705 U3.9
SQW/INT: J6.01 R3.2 U2.3 U4.10 | length 52.3
  Top Layer w0.254: U2.3 20.955,15.113 ; 23.749,55.499 23.753,55.495 U4.10
  Top Layer w0.508: J6.01 J6.01@12.763,30.416 ; 20.955,15.113 20.955,16.383 12.954,24.384 12.954,26.619 R3.2 12.802,26.772 12.802,30.378 J6.01@12.763,30.416 ; 23.749,55.499 23.23,54.98 22.081,54.98 21.513,54.411 21.513,39.166 J6.01@12.763,30.416
SW1: R8.1 R10.1 SW1.3 SW1.4 | length 17
  Top Layer w0.762: R8.1 71.501,44.45 72.39,45.339 73.341,45.339 73.66,45.658 SW1.3 SW1.4 73.555,36.725 70.158,36.725 R10.1
SW2: R9.1 R11.1 SW2.3 SW2.4 | length 16.9
  Top Layer w0.762: R11.1 11.122,36.725 7.725,36.725 SW2.3 SW2.4 7.874,45.466 9.144,45.466 10.16,44.45 R9.1
SWIN: J14.02 U4.18 | length 7.5
  Top Layer w0.254: 29.744,60.045 U4.18
  Top Layer w0.508: 29.744,60.045 29.582,60.207 29.582,64.909 30.48,65.807 J14.02
TX: J15.02 U4.2 | length 5.7
  Top Layer w0.254: 23.749,60.706 25.029,60.706 U4.2
  Top Layer w0.508: J15.02 22.606,60.706 23.749,60.706
VBAT: BT1.1 C3.1 J9.01 U2.14 | length 28.3
  Top Layer w0.254: U2.14 20.955,24.636
  Top Layer w0.508: J9.01 28.035,30.385 28.035,26.765 C3.1
  Top Layer w0.762: 20.955,24.636 27.669,24.636 28.115,25.083 28.115,26.655 C3.1 39.05,26.67 BT1.1
VCAP: C11.1 U4.8 | length 8.6
  Top Layer w0.254: U4.8 25.066,56.769 26.543,56.769
  Top Layer w0.508: 26.543,56.769 28.116,58.342 C11.1
VIN: C1.1 D1.C J7.01 U1.3 | length 9.9
  Top Layer w0.508: J7.01 66.04,27.94 C1.1 ; U1.3 66.689,25.15 66.17,25.669 C1.1 ; D1.C 68.555,27.08 67.695,27.94 C1.1
pads on no net: J1. J1.A5 J1.A6 J1.A7 J1.A8 J1.B5 J1.B6 J1.B7 J1.B8 U2.1 U2.4 U2.5 U2.6 U2.7 U2.8 U2.9 U2.10 U2.11 U2.12 U3.10 U3.11 U3.19 U3.20 U4.1 U4.5 U4.6 U4.14 U4.17 U4.20

## Polygon pours and split planes (outlines as drawn)
GND on Bottom Layer "GND_L01_P002" (solid, pour order 4): 0,10 0,70 cw(c10,70) 10,80 70,80 cw(c70,70) 80,70 80,10 cw(c70,10) 70,0 10,0 cw(c10,10)
GND on Top Layer "GND_L02_P001" (solid, pour order 9): 0,10 0,70 cw(c10,70) 10,80 70,80 cw(c70,70) 80,70 80,10 cw(c70,10) 70,0 10,0 cw(c10,10)

## Keep-outs
Keep-Out Layer:
  the board outline again, w0.1

## Silkscreen, mask and mechanical layers (free items; w line width, h text height)
Top Overlay:
  text "Clock by Denys. Rev.1.0" at 25.146,76.962 h1.52
  text "+3.3V" at 23.2,68.2 h0.7
  text "GND" at 26.95,68.2 h0.7
  text "SWIN" at 29.45,68.2 h0.7
  text "RST" at 32.7,68.2 h0.7
  text "+3.3V" at 15.45,60.45 h0.7
  text "TX" at 17.345,57.985 h0.7
  text "RX" at 17.345,55.445 h0.7
  text "GND" at 16.71,52.905 h0.7
  text "G1" at 33.855,44.015 h0.7
  text "S1" at 36.395,44.015 h0.7
  text "S6" at 38.935,44.015 h0.7
  text "G2" at 41.475,44.015 h0.7
  text "G3" at 44.015,44.015 h0.7
  text "S2" at 46.555,44.015 h0.7
  text "S5" at 33.855,37.03 h0.7
  text "S4" at 36.395,37.03 h0.7
  text "S8" at 38.935,37.03 h0.7
  text "S3" at 41.475,37.03 h0.7
  text "S7" at 44.015,37.03 h0.7
  text "G4" at 46.555,37.03 h0.7